# Altium PCB Test.PcbDoc
Units mil, origin at the board's own origin, x right, y up, seen from the top; angles counter-clockwise.
Board outline 6000 x 4000 mil, 2 copper layers (Top Layer, Bottom Layer); 25 components, 0 nets, 50 pads, 0 vias.
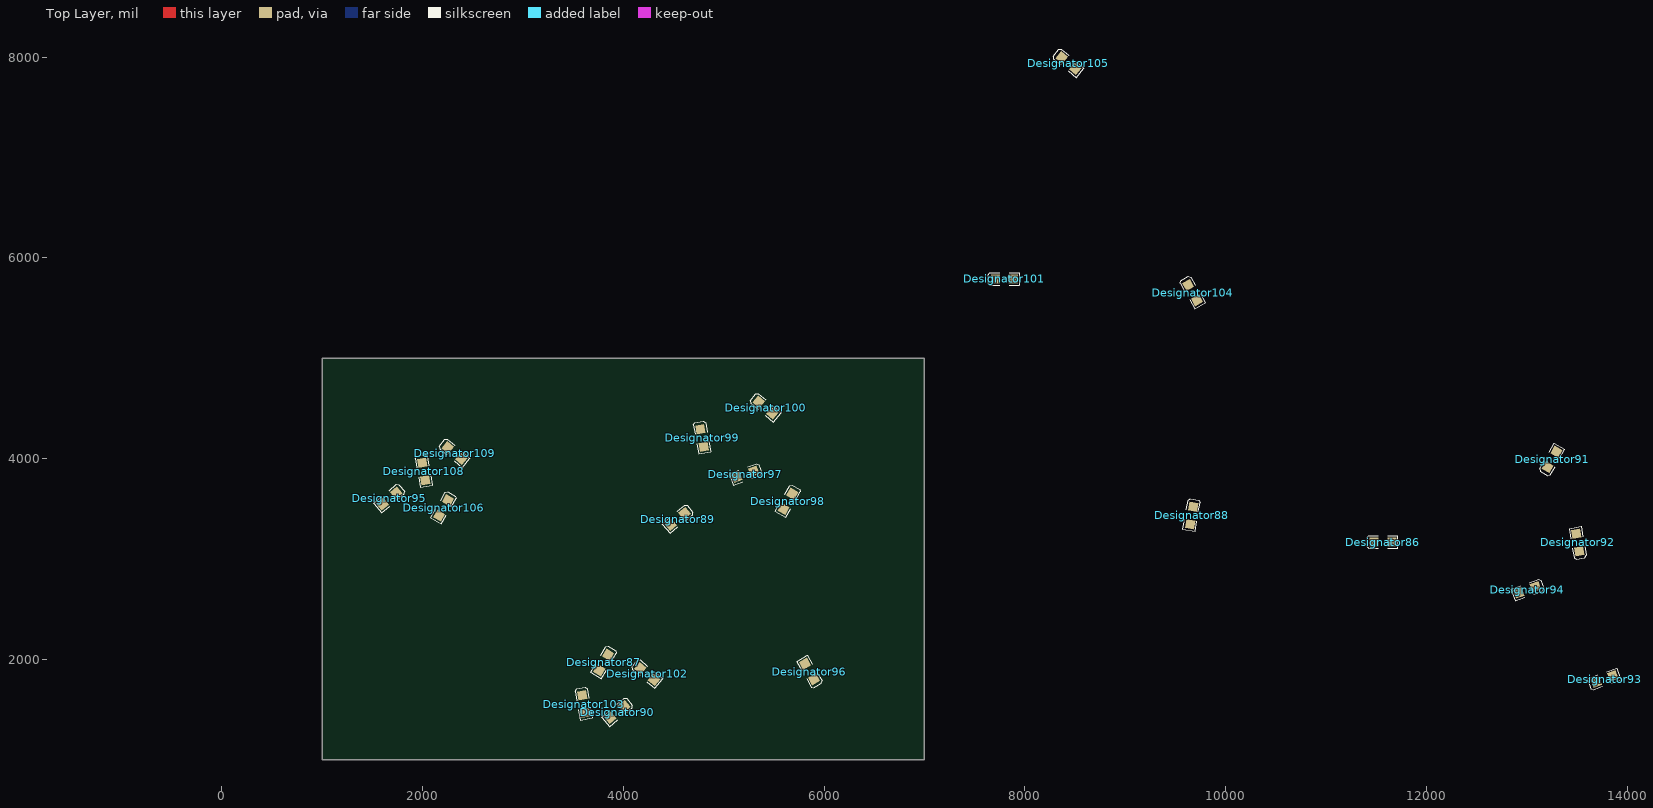
[diagram p0: Top Layer view]
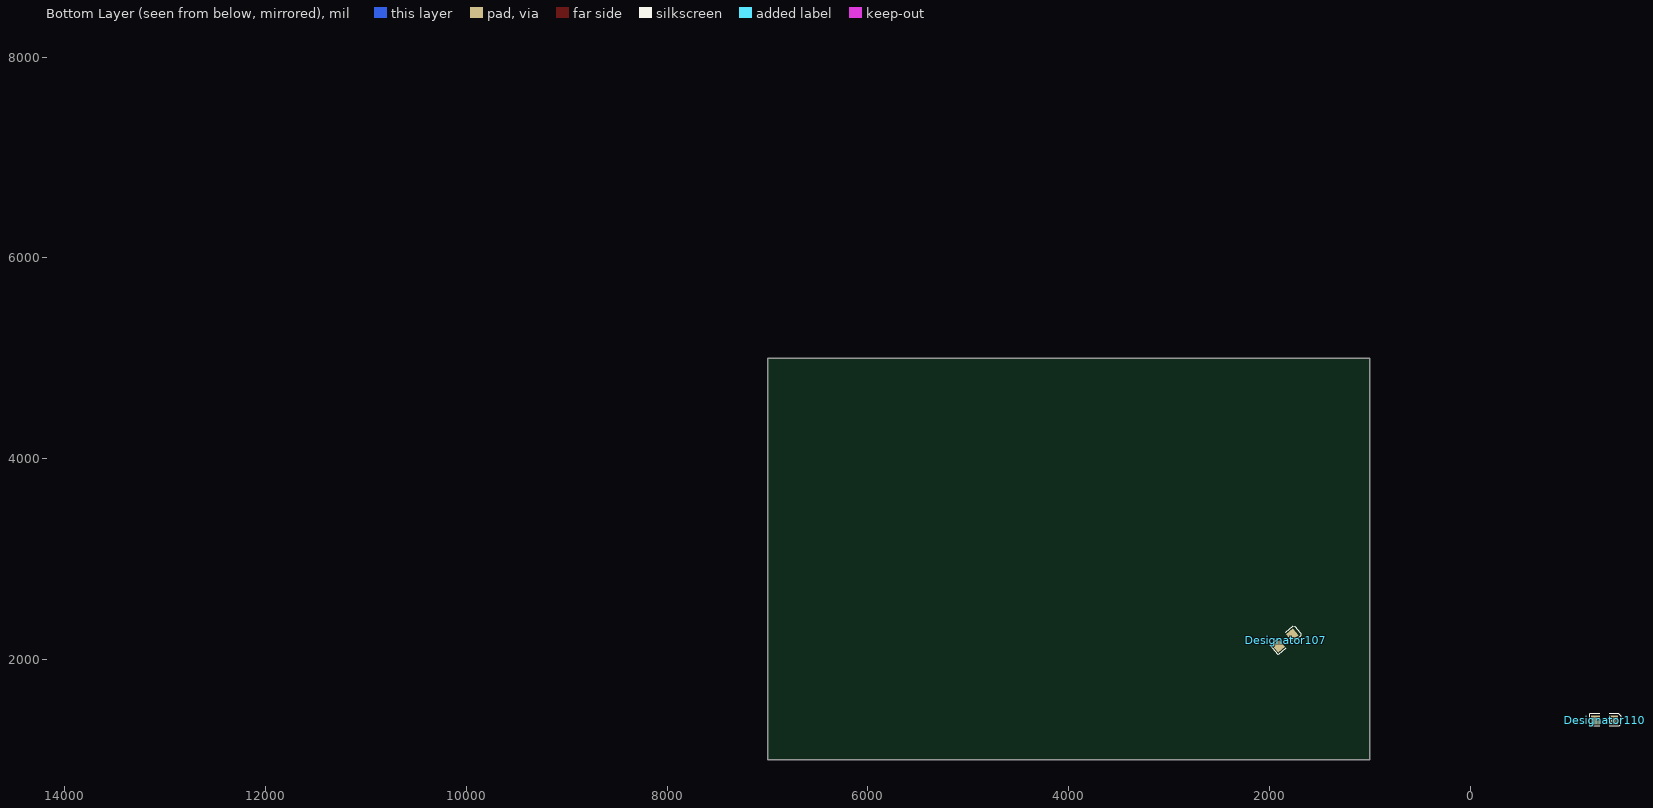
[diagram p1: Bottom Layer view, seen from below]

## Layer stack, top to bottom
Top Layer: signal copper 1.4
Dielectric: dielectric 12.6, FR-4, Dk 4.8
Bottom Layer: signal copper 1.4

## Board outline
1000,1000 7000,1000 7000,5000 1000,5000

## Design rules (kind name [scope] priority, off if disabled: settings)
Clearance [All] p1: gap=10
PolygonConnect [All] p1: connectstyle=Relief reliefconductorwidth=10 reliefentries=4 polygonreliefangle="90 Angle"
RoutingVias [All] p1: holewidth=28 width=50 viastyle="Through Hole" minholewidth=28 minwidth=50 maxholewidth=28 maxwidth=50
SilkscreenOverComponentPads [All] p1: minsilkscreentomaskgap=10
SolderMaskExpansion [All] p1: expansion=4
Width [All] p1: maxlimit=10 minlimit=10 preferedwidth=10
27 further rules are at their usual default settings.

## Components (designator, comment, footprint, x,y, rotation, side; value= is the part's Value field where it differs from the comment)
Designator86 "Comment" SMB 11566.81,3169.72 r180 top
Designator87 "Comment" SMB 3805,1970 r60 top
Designator88 "Comment" SMB 9661.01,3435 r80 top
Designator89 "Comment" SMB 4542.14,3398.06 r40 top
Designator90 "Comment" SMB 3940,1475 r40 top
Designator91 "Comment" SMB 13251.34,3992.75 r240 top
Designator92 "Comment" SMB 13506.2,3166.8 r280 top
Designator93 "Comment" SMB 13773.89,1805.21 r200 top
Designator94 "Comment" SMB 13002.79,2692.62 r20 top
Designator95 "Comment" SMB 1670,3605 r40 top
Designator96 "Comment" SMB 5855,1880 r300 top
Designator97 "Comment" SMB 5215,3845 r20 top
Designator98 "Comment" SMB 5640,3575 r60 top
Designator99 "Comment" SMB 4784.62,4207.24 r100 top
Designator100 "Comment" SMB 5417.86,4508.06 r140 top
Designator101 "Comment" SMB 7795.57,5790.47 r180 top
Designator102 "Comment" SMB 4238.35,1855.87 r140 top
Designator103 "Comment" SMB 3605.11,1555.05 r100 top
Designator104 "Comment" SMB 9670.52,5653.71 r120 top
Designator105 "Comment" SMB 8434.25,7938.87 r140 top
Designator106 "Comment" SMB 2210,3510 r60 top
Designator107 "Comment" SMB 1840,2190 r140 bottom
Designator108 "Comment" SMB 2012.84,3873.17 r100 top
Designator109 "Comment" SMB 2319.47,4054.29 r140 top
Designator110 "Comment" SMB -1336.62,1396.82 r180 bottom

## Footprints (in the part's own frame and the unit in brackets; to place one, negate y for a bottom-side part, rotate by r counter-clockwise, add the part's x,y. Pads: shape width x height; smd on the part's side, far side on the other; paste and mask are expansions set on the pad)
SMB [mm] "DO-214-AA/SMB; 2 C-Bend Leads; Body 5.3 x 3.6 mm, inc. leads (LxW)"
  rect 2.3x2.3 smd: 1(-2.25,0) 2(2.25,0)
  silkscreen extent -3.8,-1.55 4.1,1.55

## Nets (pads, with @x,y where several pads share a name; then routed paths per layer and width w, separated by ;. In a path a pad name is that pad's centre, name@x,y a point inside that pad or via, vN(x,y) a via of type N, cw(c..) or ccw(c..) an arc to the next point about the centre after c; other vN are vias at no path point)
pads on no net: Designator86.1 Designator86.2 Designator87.1 Designator87.2 Designator88.1 Designator88.2 Designator89.1 Designator89.2 Designator90.1 Designator90.2 Designator91.1 Designator91.2 Designator92.1 Designator92.2 Designator93.1 Designator93.2 Designator94.1 Designator94.2 Designator95.1 Designator95.2 Designator96.1 Designator96.2 Designator97.1 Designator97.2 Designator98.1 Designator98.2 Designator99.1 Designator99.2 Designator100.1 Designator100.2 Designator101.1 Designator101.2 Designator102.1 Designator102.2 Designator103.1 Designator103.2 Designator104.1 Designator104.2 Designator105.1 Designator105.2 Designator106.1 Designator106.2 Designator107.1 Designator107.2 Designator108.1 Designator108.2 Designator109.1 Designator109.2 Designator110.1 Designator110.2